# Allegro board bldcv2.brd
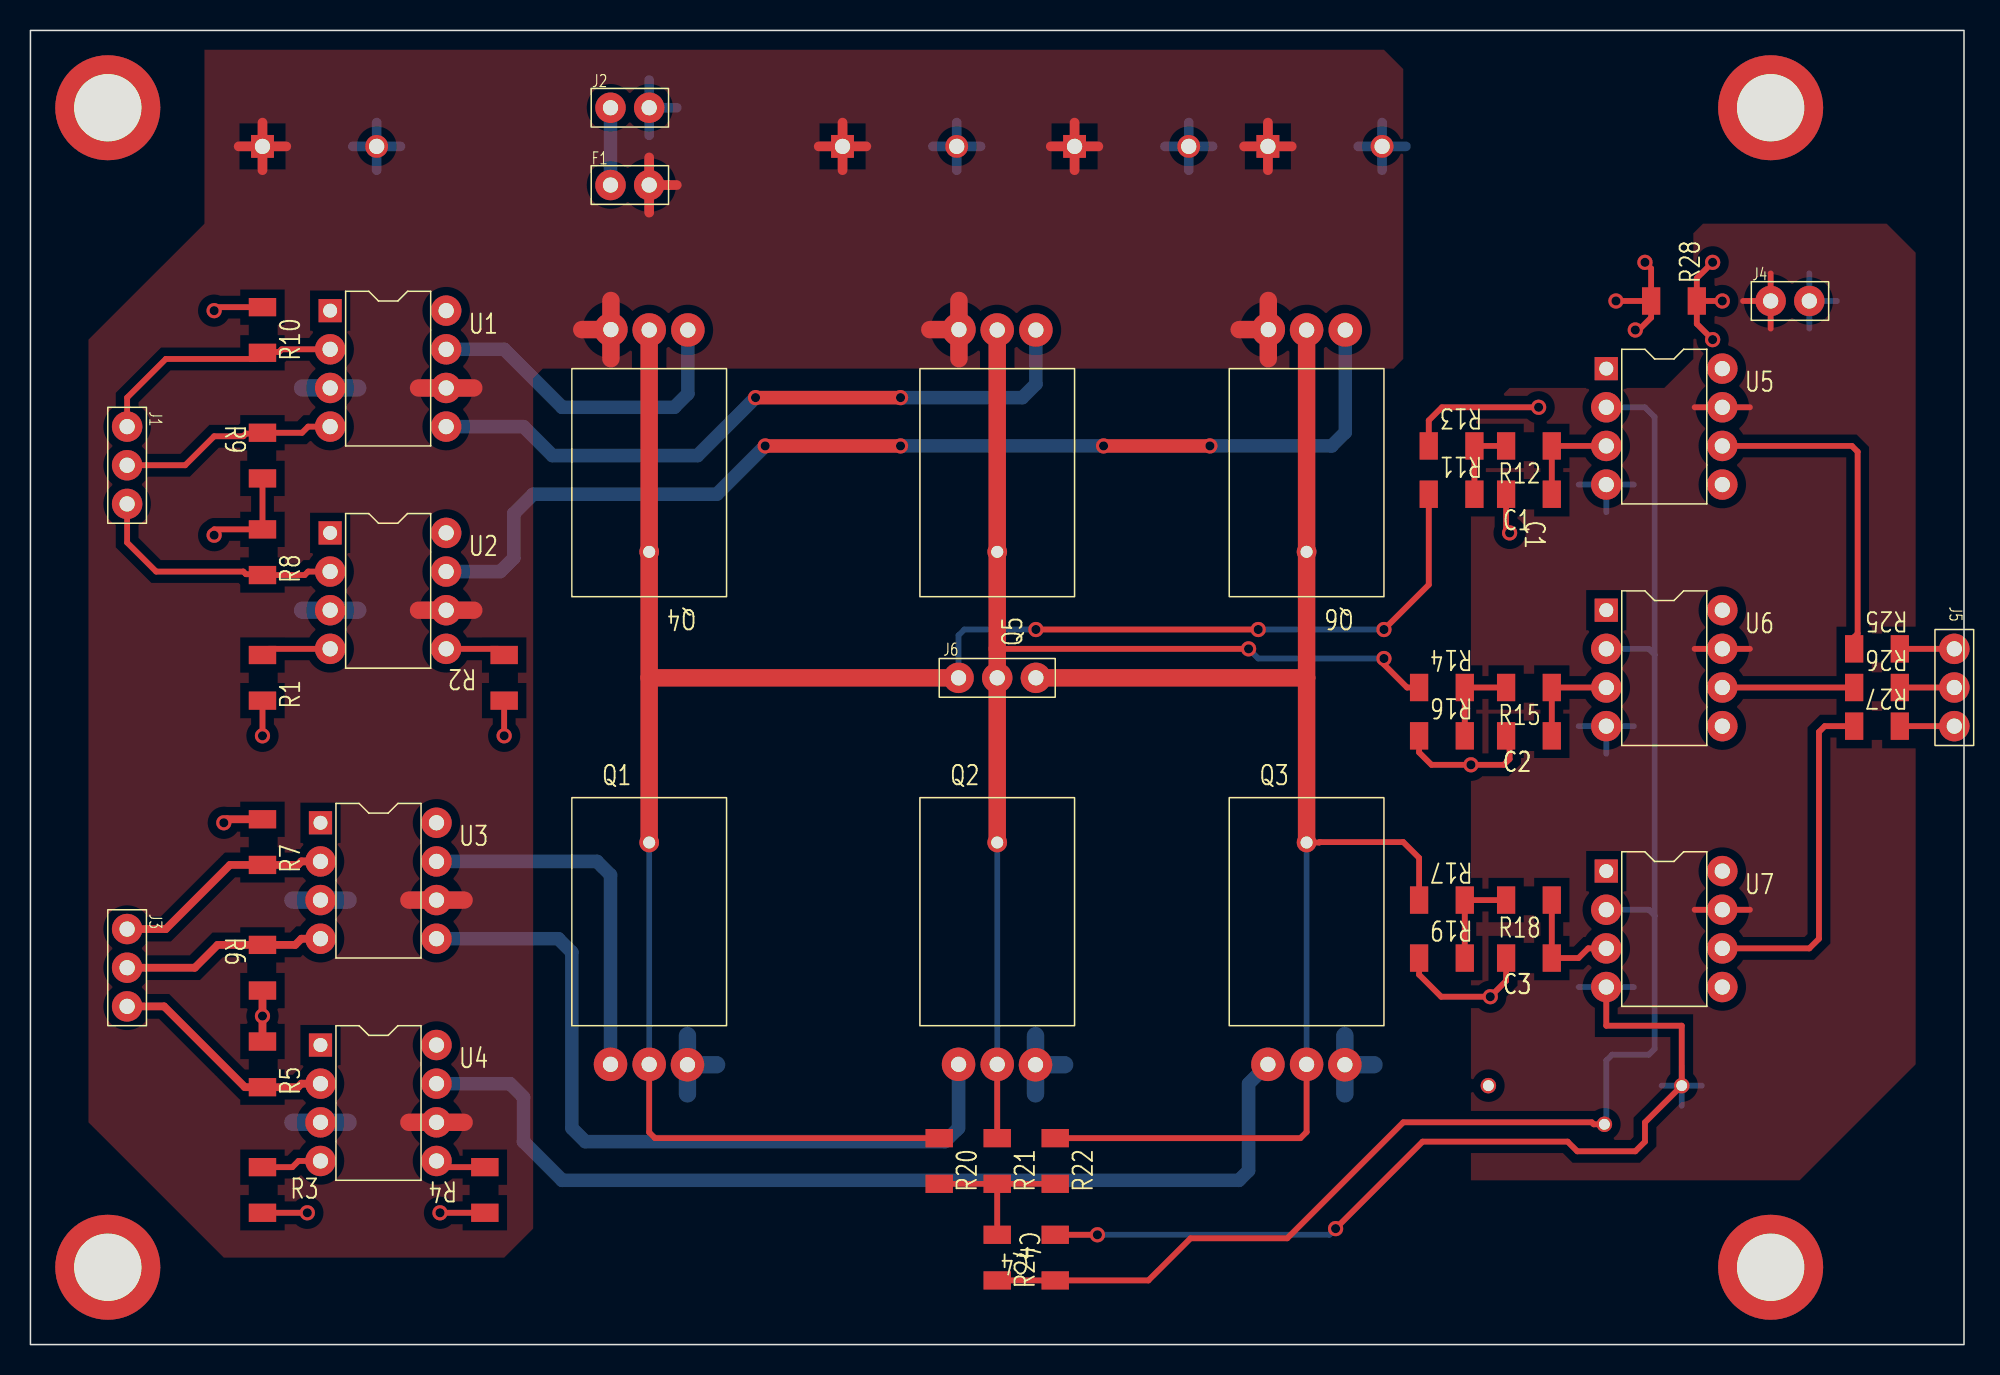
[diagram p0: board, top side]
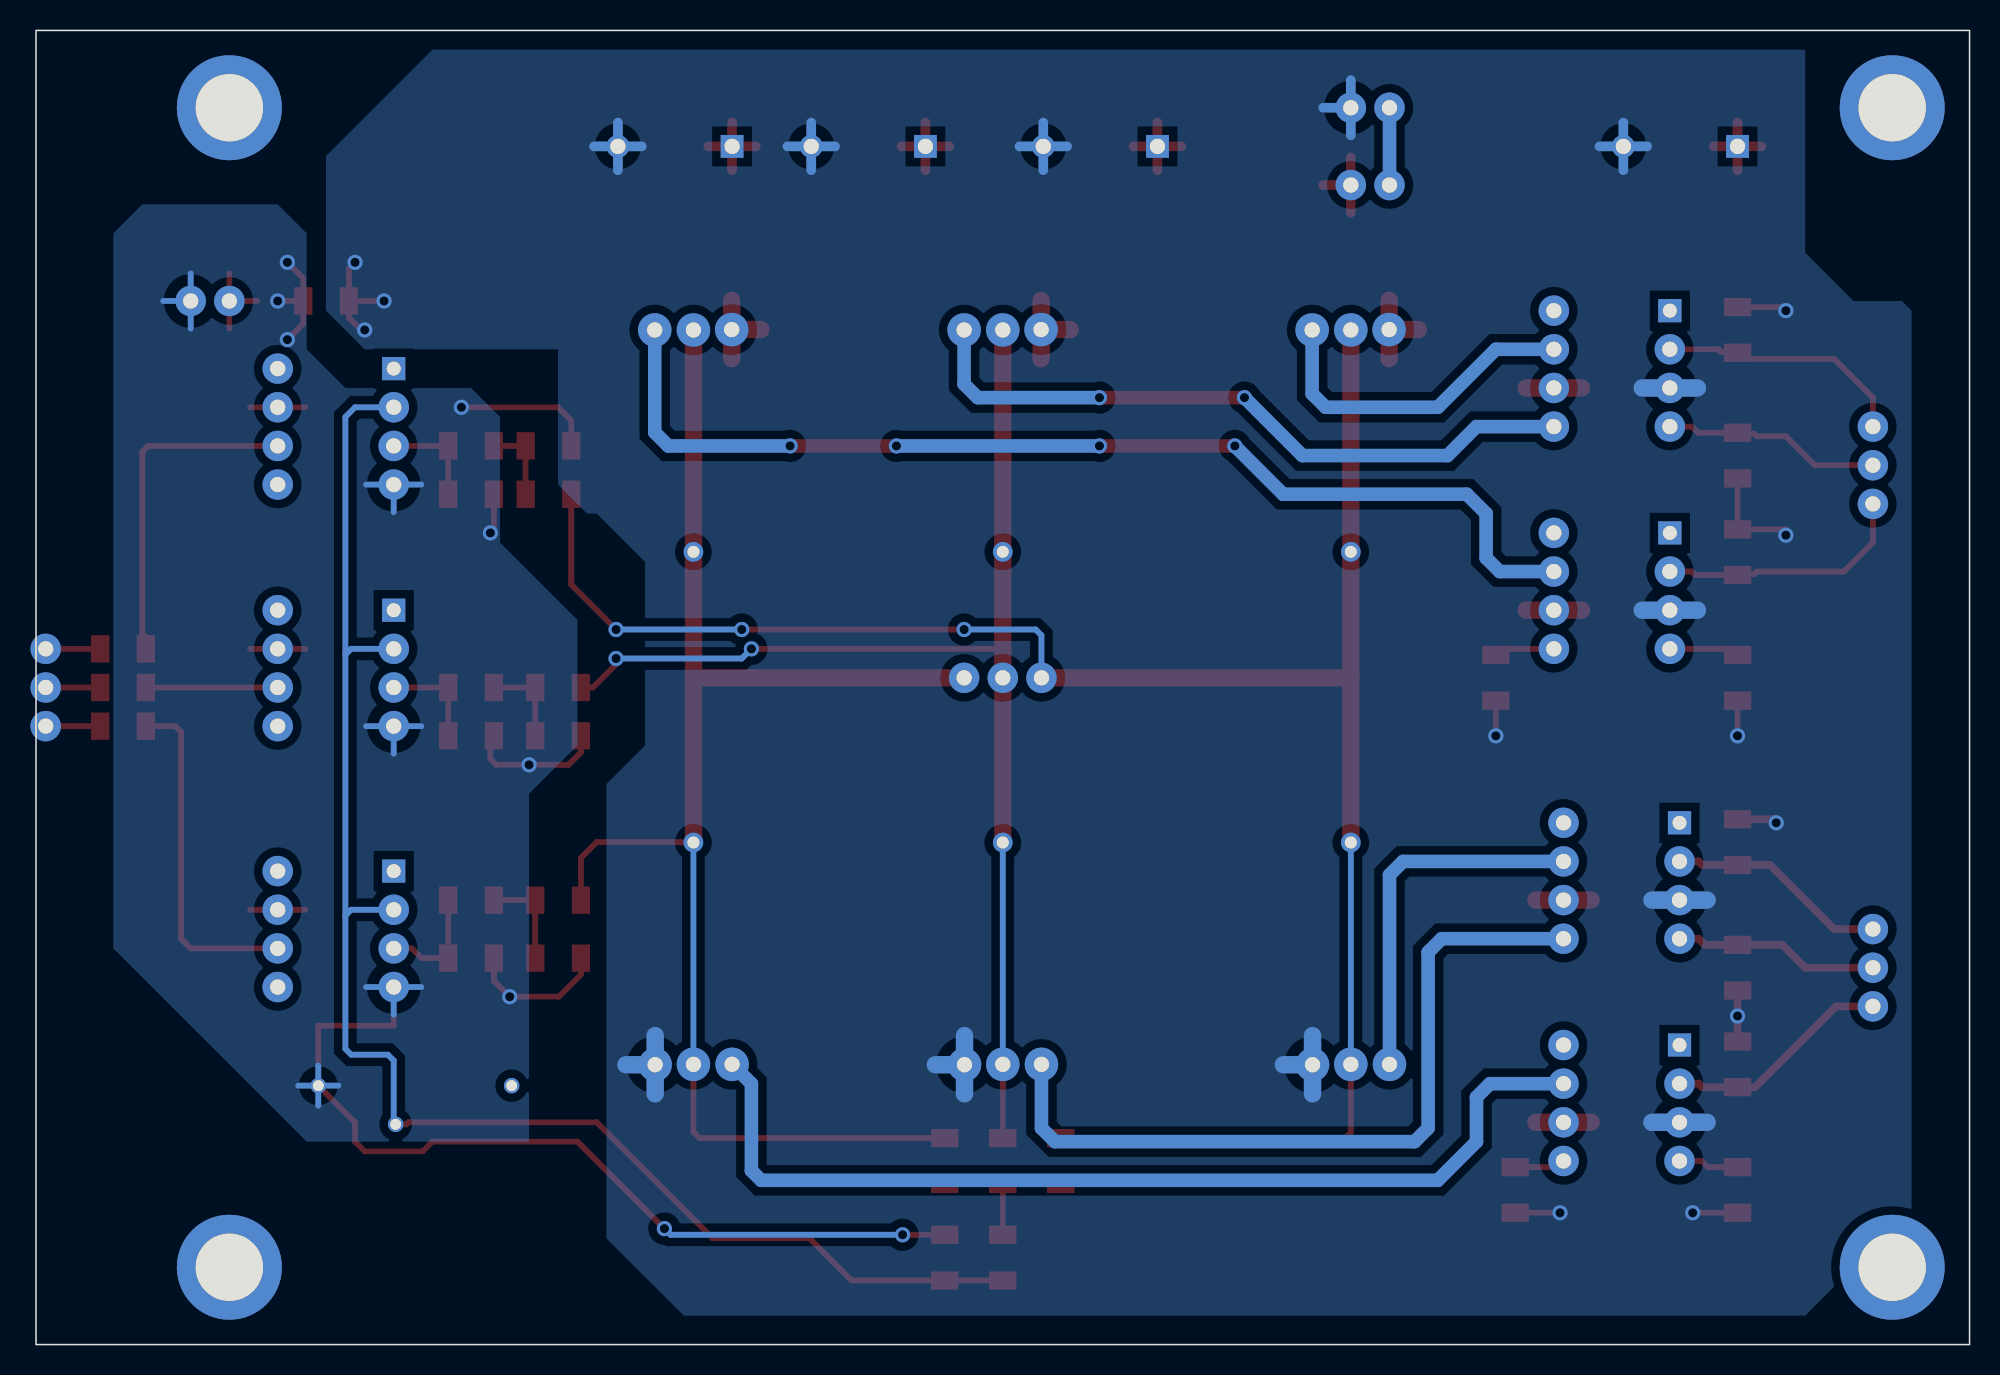
[diagram p1: board, bottom side, seen from below]

Outline 127 x 86.36 mm; copper layers: TOP, BOTTOM. Coordinates in mm from the lower left corner of the outline.
Outline path: rectangle 0,0 127,86.36

## Placement (name value [footprint] x y rotation side)
C1  .01u  [SMD_CAP_1206]  98.42 55.88 0 top
C2  .01u  [SMD_CAP_1206]  98.42 40 0 top
C3  .01u  [SMD_CAP_1206]  98.42 25.4 0 top
C4  .01u  [SMD_CAP_1206]  67.31 5.72 270 top
C5  100uF  [CAP_LARGE]  53.34 78.74 0 top
C6  100uF  [CAP_LARGE]  68.58 78.74 0 top
C7  100uF  [CAP_LARGE]  81.28 78.74 0 top
C8  100uF  [CAP_LARGE]  15.24 78.74 0 top
F1  FUSE  [JUMPER2]  38.1 76.2 0 top
J1  H-Bridge High Logic  [JUMPER3]  6.35 60.32 270 top
J2  Motor Power  [JUMPER2]  38.1 81.28 0 top
J3  H-Bridge Low Logic  [JUMPER3]  6.35 27.3 270 top
J4  Logic Power  [JUMPER2]  114.3 68.58 0 top
J5  Comparator Output  [JUMPER3]  126.36 45.72 270 top
J6  Motor Connection  [JUMPER3]  60.96 43.81 0 top
NOREF  -  [unnamed]  114.3 81.28 0 top
NOREF#2  -  [unnamed]  114.3 5.08 0 top
NOREF#3  -  [unnamed]  5.08 81.28 0 top
NOREF#4  -  [unnamed]  5.08 5.08 0 top
Q1  IXTP180N10T  [TO220H]  38.1 18.41 0 top
Q2  IXTP180N10T  [TO220H]  60.96 18.41 0 top
Q3  IXTP180N10T  [TO220H]  81.28 18.41 0 top
Q4  IXTP96P085T  [TO220H]  43.18 66.68 180 top
Q5  IXTP96P085T  [TO220H]  66.04 66.68 180 top
Q6  IXTP96P085T  [TO220H]  86.36 66.68 180 top
R1  200K  [SMD_RES_1206]  15.24 43.81 90 top
R2  200K  [SMD_RES_1206]  31.12 43.81 270 top
R3  200K  [SMD_RES_1206]  15.24 10.16 90 top
R4  200K  [SMD_RES_1206]  29.84 10.16 270 top
R5  200K  [SMD_RES_1206]  15.24 18.41 90 top
R6  200K  [SMD_RES_1206]  15.24 24.76 270 top
R7  200K  [SMD_RES_1206]  15.24 33.02 90 top
R8  200K  [SMD_RES_1206]  15.24 52.07 90 top
R9  200K  [SMD_RES_1206]  15.24 58.42 270 top
R10  200K  [SMD_RES_1206]  15.24 66.68 90 top
R11  10k  [SMD_RES_1206]  93.35 55.88 180 top
R12  1k  [SMD_RES_1206]  98.42 59.06 0 top
R13  1k  [SMD_RES_1206]  93.35 59.06 180 top
R14  10k  [SMD_RES_1206]  92.71 43.18 180 top
R15  1k  [SMD_RES_1206]  98.42 43.18 0 top
R16  1k  [SMD_RES_1206]  92.71 40 180 top
R17  10k  [SMD_RES_1206]  92.71 29.21 180 top
R18  1k  [SMD_RES_1206]  98.42 29.21 0 top
R19  1k  [SMD_RES_1206]  92.71 25.4 180 top
R20  1k  [SMD_RES_1206]  59.69 12.06 90 top
R21  1k  [SMD_RES_1206]  63.5 12.06 90 top
R22  1k  [SMD_RES_1206]  67.31 12.06 90 top
R23  POT  [BOURNS_3006P]  111.76 18.41 180 top
R24  10k  [SMD_RES_1206]  63.5 5.72 90 top
R25  1k  [SMD_RES_1206]  121.29 45.72 180 top
R26  1k  [SMD_RES_1206]  121.29 43.18 180 top
R27  1k  [SMD_RES_1206]  121.29 40.64 180 top
R28  0  [SMD_RES_1206]  107.95 68.58 180 top
U1  IXDI604PI  [DIP8_3]  19.69 67.94 0 top
U2  IXDI604PI  [DIP8_3]  19.69 53.34 0 top
U3  IXDN602  [DIP8_3]  19.05 34.29 0 top
U4  IXDN602  [DIP8_3]  19.05 19.69 0 top
U5  mcp601 opamp  [DIP8_3]  103.51 64.13 0 top
U6  mcp601 opamp  [DIP8_3]  103.51 48.26 0 top
U7  mcp601 opamp  [DIP8_3]  103.51 31.11 0 top

## Library data of the parts
C1-C4 = C
C5-C8 = CAPACITOR
F1 = FUSE
J1 J3 J5 J6 = HEADER 3: User Part Number: ***
J2 J4 = HEADER 2
Q1-Q3 = IXTP180N10T
Q4-Q6 = IXTP96P085T
R1-R22 R24-R28 = R
R23 = POT
U1 U2 = IXDI604PI: Tolerance: ***; User Part Number: ***
U3 U4 = IXDN602: Tolerance: ***; User Part Number: ***
U5-U7 = mcp601 opamp: Tolerance: ***; User Part Number: ***

## Footprints (pads in the part's own frame, mm; a bottom-side part is the same pattern mirrored in y, then rotated)
BOURNS_3006P
  round 1.016 hole 0.711: 1(3.3,1.4) 2(8.38,3.94) 3(16,1.4)
CAP_LARGE
  rect 1.5x1.5 hole 1: 1(0,0)
  round 1.5 hole 1: 2(7.5,0)
DIP8_3
  rect 1.524x1.524 hole 0.914: 1(0,0)
  round 2 hole 1: 2(0,-2.54) 3(0,-5.08) 4(0,-7.62) 5(7.62,-7.62) 6(7.62,-5.08) 7(7.62,-2.54) 8(7.62,0)
JUMPER2
  round 2 hole 1: 1(0,0) 2(2.54,0)
JUMPER3
  round 2 hole 1: 1(0,0) 2(2.54,0) 3(5.08,0)
SMD_CAP_1206
  rect 1.2x1.8 smd: 1(-1.5,0) 2(1.5,0)
SMD_RES_1206
  rect 1.2x1.8 smd: 1(-1.5,0) 2(1.5,0)
TO220H
  round 2.2 hole 1: 1(0,0) 2(2.54,0) 3(5.055,-0.025)
  round 1.295 hole 0.787: 4(2.54,14.58)
unnamed
  round 6.9 hole 4.42: (0,0)

## Nets
3V3: J4.1 U5.7 U6.7 U7.7
12V: C5.1 C6.1 C7.1 C8.1 F1.2 Q4.3(S) Q5.3(S) Q6.3(S) U1.6 U2.6 U3.6 U4.6
GND_POWER: C5.2 C6.2 C7.2 C8.2 J2.2 Q1.3(S) Q2.3(S) Q3.3(S) R1.1 R2.2 R3.1 R4.2 R5.2 R6.2 R7.2 R8.2 R9.2 R10.2 R28.2 U1.3 U2.3 U3.3 U4.3
0: C1.1 C2.1 C3.1 C4.1 J4.2 R13.2 R16.2 R19.2 R23.1(A) R28.1 U5.4 U6.4 U7.4
CMPOUT1: R25.2 U5.6(OUT)
CMPOUT2: R26.2 U6.6(OUT)
CMPOUT3: R27.2 U7.6(OUT)
MOTOR1: J6.1 Q1.2(D) Q1.4(TAB) Q4.2(D) Q4.4(TAB) R11.2 R20.2
MOTOR1_H: J1.1 R10.1 U1.2(IN)
MOTOR1_L: J3.1 R7.1 U3.2(IN)
MOTOR2: J6.2 Q2.2(D) Q2.4(TAB) Q5.2(D) Q5.4(TAB) R14.2 R21.2
MOTOR2_H: J1.2 R9.1 U1.4(IN)
MOTOR2_L: J3.2 R6.1 U3.4(IN)
MOTOR3: J6.3 Q3.2(D) Q3.4(TAB) Q6.2(D) Q6.4(TAB) R17.2 R22.2
MOTOR3_H: J1.3 R8.1 U2.2(IN)
MOTOR3_L: J3.3 R5.1 U4.2(IN)
NFET1: Q1.1(G) U3.7(OUT)
NFET2: Q2.1(G) U3.5(OUT)
NFET3: Q3.1(G) U4.7(OUT)
OPAMP1+: C1.2 R12.2 U5.3(+)
OPAMP2+: C2.2 R15.2 U6.3(+)
OPAMP3+: C3.2 R18.2 U7.3(+)
OPAMP-: C4.2 R23.2(WIPER) R24.1 U5.2(-) U6.2(-) U7.2(-)
PFET1: Q4.1(G) U1.7(NOUT)
PFET2: Q5.1(G) U1.5(NOUT)
PFET3: Q6.1(G) U2.7(NOUT)
N43497: F1.1 J2.1
N48628: R11.1 R12.1 R13.1
N49596: R20.1 R21.1 R22.1 R24.2
N50731: R14.1 R15.1 R16.1
N50994: R17.1 R18.1 R19.1
N51189: J5.1 R25.1
N51273: J5.2 R26.1
N51292: J5.3 R27.1
N530790: R1.2 U2.4(IN)
N530791: R2.1 U2.5(NOUT)
N558620: R3.2 U4.4(IN)
N558621: R4.1 U4.5(OUT)

Pads without a net: R23 3; U1 1 8; U2 1 8; U3 1 8; U4 1 8; U5 1 5 8; U6 1 5 8; U7 1 5 8

## Via types
v1: diameter 1, hole 0.6, TOP to BOTTOM, 31 vias

## Routing (per net, layer and track width the routed paths; a pad name or vN(x,y) marks a point on that pad's centre or on a via; arc(x,y) is an arc through that point)
3V3: length 16.3
  TOP w0.381: 112.94,45.72 U6.7 109.31,45.72 ; 112.94,28.57 U7.7 109.31,28.57 ; 114.3,66.77 J4.1 ; J4.1 114.3,70.39 ; J4.1 112.49,68.58 ; 112.94,61.59 U5.7 109.31,61.59
12V: length 62.2
  TOP w0.635: F1.2 42.45,76.2 ; F1.2 40.64,74.39 ; F1.2 40.64,78.01 ; 13.68,78.74 C8.1 ; C8.1 15.24,77.18 ; C8.1 15.24,80.3 ; C8.1 16.8,78.74 ; 81.28,77.18 C7.1 ; C7.1 81.28,80.3 ; C7.1 82.84,78.74 ; C7.1 79.72,78.74 ; C5.1 54.9,78.74 ; C5.1 53.34,77.18 ; C5.1 51.78,78.74 ; C5.1 53.34,80.3 ; 68.58,77.18 C6.1 ; C6.1 67.02,78.74 ; C6.1 68.58,80.3 ; C6.1 70.14,78.74
  TOP w1.143: 24.86,29.21 U3.6 28.48,29.21 ; 29.12,62.87 U1.6 25.49,62.87 ; 38.13,64.79 Q4.3 ; Q4.3 36.21,66.7 ; Q4.3 38.13,68.61 ; 28.48,14.6 U4.6 24.86,14.6 ; Q5.3 60.99,68.61 ; Q5.3 59.07,66.7 ; Q5.3 60.99,64.79 ; Q6.3 81.31,68.61 ; Q6.3 79.39,66.7 ; Q6.3 81.31,64.79 ; 29.12,48.26 U2.6 25.49,48.26
GND_POWER: length 96.5
  TOP w0.381: v1(12.06,67.94) 12.06,68.18 R10.2 ; R4.2 v1(26.9,8.66) ; R3.1 v1(18.18,8.66) ; v1(12.06,53.19) 12.06,53.57 R8.2 R9.2 ; R2.2 v1(31.12,40) ; v1(105.41,66.68) 105.64,66.68 106.45,67.49 R28.2 ; R28.2 106.45,70.72 v1(106.05,71.12) ; R28.2 v1(104.14,68.58) ; R1.1 v1(15.24,40)
  TOP w0.508: R7.2 12.93,34.52 v1(12.7,34.29) ; R6.2 v1(15.24,21.59) R5.2
  BOTTOM w0.635: C6.2 76.08,80.3 ; C6.2 77.64,78.74 ; C6.2 76.08,77.18 ; C6.2 74.52,78.74 ; 22.74,77.18 C8.2 ; C8.2 21.18,78.74 ; C8.2 24.3,78.74 ; C8.2 22.74,80.3 ; C7.2 90.34,78.74 ; C7.2 87.22,78.74 ; C7.2 88.78,80.3 ; C7.2 88.78,77.18 ; 40.64,79.47 J2.2 ; J2.2 40.64,83.09 ; J2.2 42.45,81.28 ; 60.84,77.18 C5.2 ; C5.2 59.28,78.74 ; C5.2 60.84,80.3 ; C5.2 62.4,78.74
  BOTTOM w1.143: Q3.3 86.33,20.3 ; Q3.3 86.33,16.48 ; Q3.3 88.25,18.39 ; 21.5,48.26 U2.3 17.87,48.26 ; 17.24,14.6 U4.3 20.86,14.6 ; 20.86,29.21 U3.3 17.24,29.21 ; 43.15,16.48 Q1.3 ; Q1.3 45.07,18.39 ; Q1.3 43.15,20.3 ; 66.01,16.48 Q2.3 ; Q2.3 66.01,20.3 ; Q2.3 67.93,18.39 ; 17.87,62.87 U1.3 21.5,62.87
0: length 122.9
  TOP w0.381: v1(110.49,66.04) 109.45,67.08 R28.1 ; R16.2 91.21,38.91 92.02,38.1 v1(94.61,38.1) 96.77,38.1 97.16,38.48 97.16,39.77 C2.1 ; 103.51,23.5 103.51,20.95 108.46,20.95 R23.1 106.05,14.6 106.05,13.33 105.41,12.7 101.6,12.7 100.97,13.33 91.44,13.33 v1(85.73,7.62) ; v1(99.06,61.59) 92.71,61.59 91.84,60.73 R13.2 ; R28.1 v1(111.13,68.58) ; R28.1 109.45,70.08 v1(110.49,71.12) ; C4.1 v1(70.08,7.22) ; v1(97.16,53.34) 96.92,53.57 C1.1 ; R19.2 91.21,24.31 92.66,22.86 v1(95.89,22.86) 96.92,23.9 C3.1
  BOTTOM w0.381: R23.1 108.46,18.34 ; R23.1 108.46,15.69 ; R23.1 107.14,17.01 ; R23.1 109.78,17.01 ; U5.4 105.32,56.51 ; U5.4 101.69,56.51 ; U5.4 103.51,54.7 ; 116.84,66.77 J4.2 ; J4.2 116.84,70.39 ; J4.2 118.65,68.58 ; v1(85.73,7.62) 85.32,7.22 v1(70.08,7.22) ; 101.69,23.5 103.51,23.5 ; 103.51,23.5 105.32,23.5 ; 103.51,23.5 103.51,21.68 ; U6.4 105.32,40.64 ; U6.4 103.51,38.83 ; U6.4 101.69,40.64
CMPOUT1: length 22.1
  TOP w0.381: R25.2 119.78,46.49 120.02,46.72 120.02,58.67 119.63,59.06 U5.6
CMPOUT2: length 8.7
  TOP w0.381: U6.6 R26.2
CMPOUT3: length 22.7
  TOP w0.381: R27.2 117.86,40.64 117.48,40.26 117.48,26.67 116.84,26.03 111.13,26.03
MOTOR1: length 133.3
  TOP w0.381: R11.2 91.84,49.93 v1(88.9,46.99) ; v1(80.64,46.99) v1(66.04,46.99) ; R20.2 41.02,13.57 40.64,13.95 Q1.2
  TOP w1.143: 40.64,43.81 Q1.4 ; 40.64,43.81 J6.1 ; 40.64,43.81 Q4.4 Q4.2
  BOTTOM w0.381: v1(66.04,46.99) 61.34,46.99 60.96,46.61 J6.1 ; v1(88.9,46.99) v1(80.64,46.99) ; Q1.4 Q1.2
MOTOR1_H: length 16.6
  TOP w0.381: U1.2 16.5,65.4 16.32,65.23 15.3,65.23 R10.1 14.84,64.77 8.89,64.77 6.35,62.23 J1.1
MOTOR1_L: length 14.5
  TOP w0.508: U3.2 17.8,31.75 17.57,31.52 R7.1 13.1,31.52 8.89,27.3 J3.1
MOTOR2: length 82.1
  TOP w0.381: v1(80.01,45.72) 63.5,45.72 ; v1(88.9,45.08) 88.9,44.7 90.42,43.18 R14.2 ; R21.2 Q2.2
  TOP w1.143: Q2.4 J6.2 Q5.4 Q5.2
  BOTTOM w0.381: v1(80.01,45.72) 80.64,45.08 v1(88.9,45.08) ; Q2.4 Q2.2
MOTOR2_H: length 14.4
  TOP w0.381: U1.4 18.24,60.32 17.84,59.92 R9.1 15.18,59.86 14.16,59.86 13.98,59.69 12.06,59.69 10.16,57.78 J1.2
MOTOR2_L: length 13.5
  TOP w0.508: U3.4 17.8,26.67 17.39,26.27 R6.1 12.3,26.27 10.8,24.76 J3.2
MOTOR3: length 97.8
  TOP w0.381: R22.2 83.42,13.57 83.82,13.97 Q3.2 ; Q3.4 84.66,32.99 84.68,33.02 90.17,33.02 91.21,31.98 R17.2
  TOP w1.143: Q6.2 Q6.4 83.82,43.81 ; Q3.4 83.82,43.81 ; 83.82,43.81 J6.3
  BOTTOM w0.381: Q3.4 Q3.2
MOTOR3_H: length 16.9
  TOP w0.381: U2.2 18.24,50.8 18.01,50.57 R8.1 15.18,50.63 14.16,50.63 13.98,50.8 8.26,50.8 6.35,52.7 J1.3
MOTOR3_L: length 15
  TOP w0.508: J3.3 8.78,22.22 14.09,16.91 R5.1 17.57,16.91 17.8,17.14 19.05,17.14
NFET1: length 24.2
  BOTTOM w0.889: Q1.1 38.1,30.86 37.21,31.75 U3.7
NFET2: length 51.1
  BOTTOM w0.889: Q2.1 60.96,14.22 60.07,13.33 36.45,13.33 35.56,14.22 35.56,25.78 34.67,26.67 U3.5
NFET3: length 65.5
  BOTTOM w0.889: Q3.1 80.01,17.14 80.01,11.43 79.38,10.79 34.92,10.79 32.39,13.33 32.39,16.26 31.5,17.14 26.67,17.14
OPAMP1+: length 6.8
  TOP w0.381: C1.2 R12.2 U5.3
OPAMP2+: length 6.8
  TOP w0.381: C2.2 R15.2 U6.3
OPAMP3+: length 7.7
  TOP w0.381: R18.2 C3.2 101.68,25.4 102.31,26.03 103.51,26.03
OPAMP-: length 103.6
  TOP w0.381: R24.1 C4.2 73.43,4.21 76.2,6.98 82.55,6.98 90.17,14.6 102.55,14.6 102.68,14.47 R23.2
  BOTTOM w0.381: 106.68,28.19 106.3,28.57 U7.2 ; 106.68,28.19 106.68,19.43 106.3,19.05 103.89,19.05 103.51,18.67 103.51,14.6 R23.2 ; 106.68,28.19 106.68,45.34 ; U6.2 106.3,45.72 106.68,45.34 ; 106.68,45.34 106.68,60.96 106.05,61.59 U5.2
PFET1: length 22
  BOTTOM w0.889: Q4.1 43.18,62.48 42.29,61.59 34.92,61.59 31.12,65.4 U1.7
PFET2: length 45
  TOP w0.889: v1(47.63,62.23) v1(57.15,62.23)
  BOTTOM w0.889: v1(47.63,62.23) 43.82,58.42 34.29,58.42 32.39,60.32 U1.5 ; v1(57.15,62.23) 65.15,62.23 66.04,63.12 Q5.1
PFET3: length 71.3
  TOP w0.889: v1(48.26,59.06) v1(57.15,59.06) ; v1(70.48,59.06) v1(77.47,59.06)
  BOTTOM w0.889: U2.7 30.86,50.8 31.75,51.69 31.75,54.61 33.02,55.88 45.08,55.88 v1(48.26,59.06) ; v1(57.15,59.06) v1(70.48,59.06) ; Q6.1 86.36,59.94 85.47,59.06 v1(77.47,59.06)
N43497: length 5.1
  BOTTOM w0.889: J2.1 F1.1
N48628: length 5.3
  TOP w0.381: R12.1 R13.1 R11.1
N49596: length 11
  TOP w0.381: R20.1 R21.1 ; R21.1 R22.1 ; R21.1 R24.2
N50731: length 5.9
  TOP w0.381: R15.1 R14.1 R16.1
N50994: length 6.5
  TOP w0.381: R19.1 R17.1 R18.1
N51189: length 3.6
  TOP w0.381: R25.1 J5.1
N51273: length 3.6
  TOP w0.381: R26.1 J5.2
N51292: length 3.6
  TOP w0.381: R27.1 J5.3
N530790: length 4.6
  TOP w0.381: U2.4 15.64,45.72 R1.2
N530791: length 4
  TOP w0.381: U2.5 30.71,45.72 R2.1
N558620: length 4
  TOP w0.381: U4.4 17.61,12.06 17.2,11.66 R3.2
N558621: length 3.3
  TOP w0.381: U4.5 27.07,11.66 R4.1

## Copper pours and planes (outline as drawn; the poured copper is in the pictures)
3V3 on TOP: 121.92,73.66 109.86,73.66 109.22,73.02 109.22,64.77 107.32,62.87 97.16,62.87 94.61,60.32 94.61,10.79 116.2,10.79 123.83,18.41 123.83,71.75
12V on TOP: 90.17,64.77 89.54,64.13 33.66,64.13 33.02,63.5 33.02,7.62 31.12,5.72 12.7,5.72 3.81,14.6 3.81,66.04 11.43,73.66 11.43,85.09 88.9,85.09 90.17,83.82
GND_POWER on BOTTOM: 10.8,85.09 10.8,71.75 7.62,68.58 4.45,68.58 3.81,67.94 3.81,8.89 10.8,1.91 84.45,1.91 89.54,6.98 89.54,36.83 86.99,39.37 86.99,51.44 90.17,54.61 90.8,54.61 92.71,56.51 92.71,65.4 105.41,65.4 107.95,67.94 107.95,78.11 100.97,85.09
0 on BOTTOM: 109.22,73.02 109.22,65.4 106.68,62.87 98.42,62.87 96.52,60.96 96.52,52.7 91.44,47.62 91.44,39.37 94.61,36.19 94.61,13.33 109.22,13.33 121.92,26.03 121.92,73.02 120.02,74.93 111.13,74.93
